# Altium PCB 逆变器直流升压.PcbDoc
Units mm, origin at the board's own origin, x right, y up, seen from the top; angles counter-clockwise.
Board outline 135.25 x 81.15 mm, 2 copper layers (Top Layer, Bottom Layer); 62 components, 41 nets, 187 pads, 0 vias.
Unrouted connection lines stored in the file: 4.
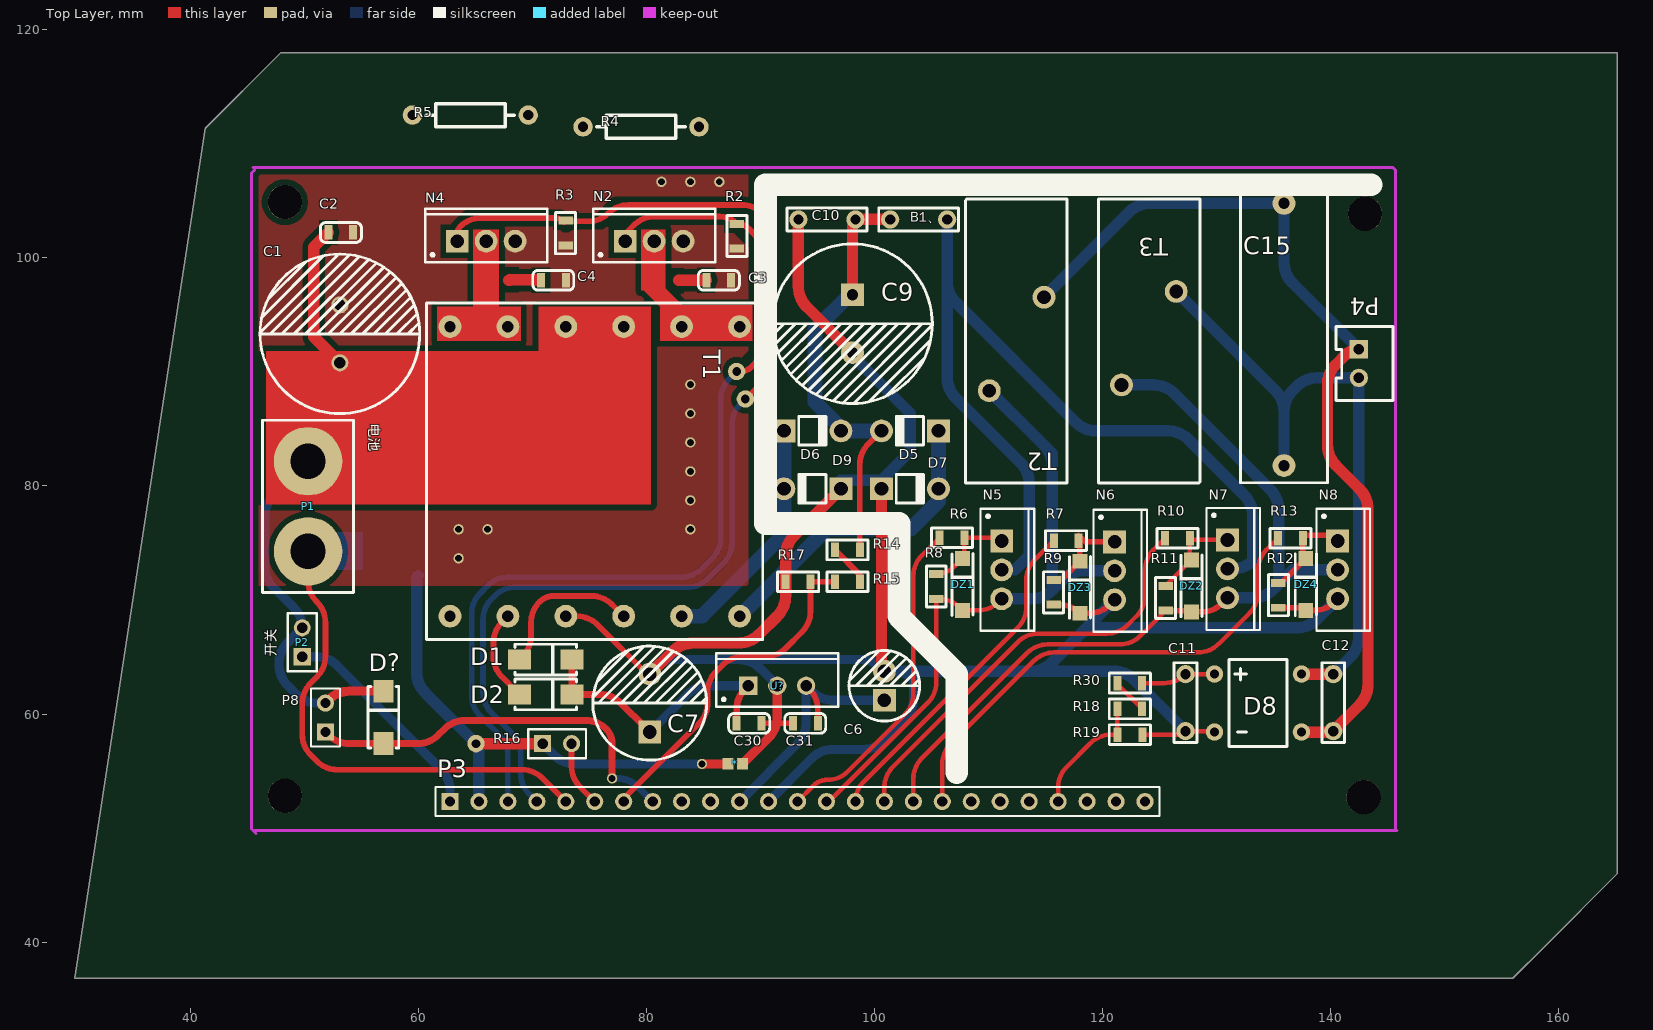
[diagram p0: Top Layer view]
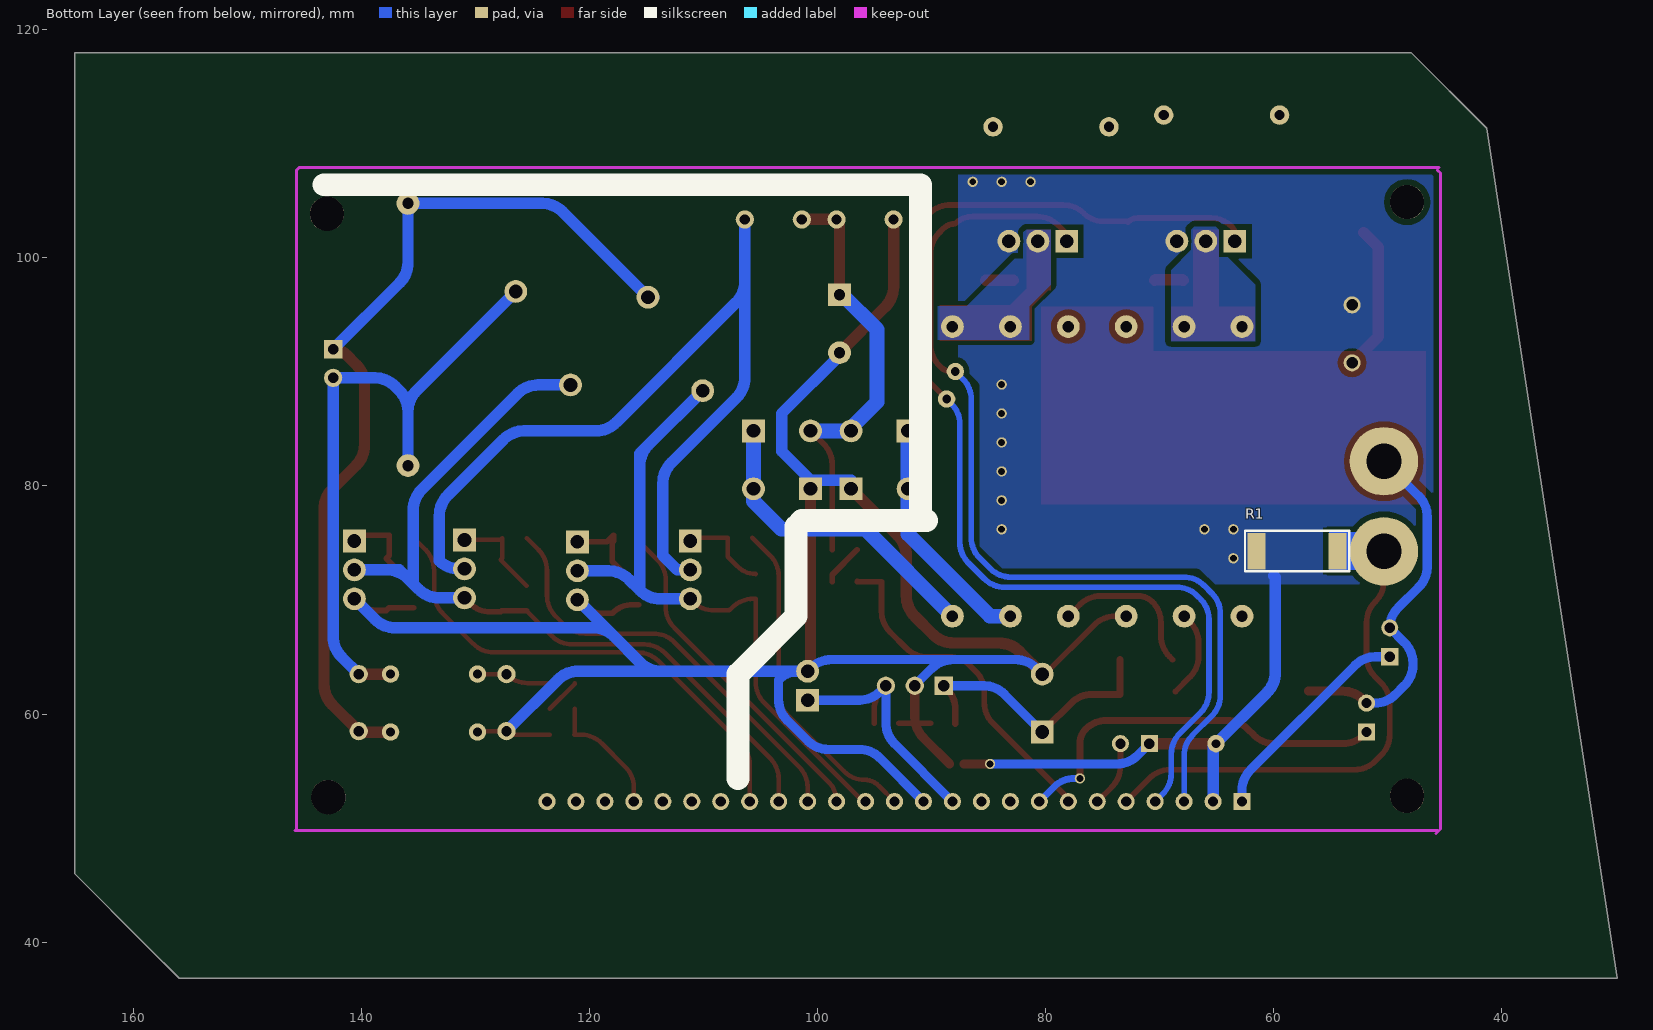
[diagram p1: Bottom Layer view, seen from below]

## Layer stack, top to bottom
Top Layer: signal copper 0.0356
Dielectric: dielectric 0.32, FR-4, Dk 4.8
Bottom Layer: signal copper 0.0356

## Board outline
41.275,111.379 47.879,117.983 165.1,117.983 165.1,45.974 158.75,39.624 155.956,36.83 29.845,36.83

## Design rules (kind name [scope] priority, off if disabled: settings)
Clearance [All] p1: gap=0.3
PolygonConnect [All] p1: connectstyle=Direct reliefconductorwidth=0.254 reliefentries=4 polygonreliefangle="90 Angle"
RoutingVias [All] p1: holewidth=0.711 width=1.27 viastyle="Through Hole" minholewidth=0.711 minwidth=1.27 maxholewidth=0.711 maxwidth=1.27
SilkscreenOverComponentPads SilkToSolderMaskClearance [IsPad] p1: minsilkscreentomaskgap=0.254
SolderMaskExpansion [All] p1: expansion=0.102
Width [All] p1: maxlimit=9 minlimit=0.254 preferedwidth=0.254 minimp=50.000000 maximp=50.000000 favimp=50.000000
27 further rules are at their usual default settings.

## Components (designator, comment, footprint, x,y, rotation, side; value= is the part's Value field where it differs from the comment)
* "TIAO" ta 88.392,55.626 r180 top
B1、 "保险" CAP3 101.346,103.378 r0 top
C1 "2200uf" 2200uf#1 53.086,93.345 r180 top
C2 "105" 0805C 52.07,102.235 r0 top
C3 "103" 0805C 85.217,98.046 r0 top
C4 "103" 0805C 72.898,98.044 r180 top
C6 "470uf" 220uf-16v 100.838,62.484 r180 top
C7 "470uf" 470uf-25v 80.264,60.96 r180 top
C9 "150uf" 2200uf#2 98.044,94.234 r0 top
C10 "1KV/103" CAP3 98.298,103.378 r180 top
C11 "1KV/103" CAP3 127.254,63.5 r270 top
C12 "1KV/103" CAP3 140.208,63.5 r270 top
C15 "600V/4.7uf" c-23mm 135.89,81.788 r90 top
C30 "105" 0805C 87.884,59.182 r0 top
C31 "105" 0805C 94.996,59.182 r180 top
D1 "107" DO-214 68.834,64.77 r0 top
D2 "107" DO-214 68.834,61.722 r0 top
D5 "1N4007" "1N4007 - duplicate" 105.584,84.836 r180 top
D6 "1N4007" "1N4007 - duplicate" 92.028,84.836 r0 top
D7 "1N4007" "1N4007 - duplicate" 100.584,79.756 r0 top
D8 "DB107" DB107 137.414,58.42 r180 top
D9 "1N4007" "1N4007 - duplicate" 97.028,79.756 r180 top
D? "1N4007" DO-214 56.896,57.404 r90 top
DZ1 "15v" "DO-214 -2" 107.696,69.088 r90 top
DZ2 "15v" "DO-214 -2" 127.762,68.961 r90 top
DZ3 "15v" "DO-214 -2" 117.983,68.834 r90 top
DZ4 "15v" "DO-214 -2" 137.795,69.088 r90 top
N2 "3025" TO-220AB-2 80.645,101.473 r0 top
N4 "3025" TO-220AB-2 65.913,101.473 r0 top
N5 "3025" TO-220AB-2 111.125,72.644 r270 top
N6 "3025" TO-220AB-2 121.031,72.559 r270 top
N7 "3025" TO-220AB-2 130.937,72.729 r270 top
N8 "3025" TO-220AB-2 140.589,72.644 r270 top
P1 "电池" M3 50.292,82.169 r0 top
P2 "开关" HDR1X2 49.784,65.024 r90 top
P3 "Header 25" HDR1X25 62.738,52.324 r0 top
P4 "CON2" CON2 139.954,94.488 r270 top
P8 "开关" HDR1X2 51.816,58.42 r90 top
R1 "0.005" 2512R 57.912,74.295 r0 bottom
R2 "10k" 0805R 87.884,100.838 r90 top
R3 "10k" 0805R 72.898,103.251 r270 top
R4 "10" AXIAL0.4 79.502,111.506 r0 top
R5 "10" AXIAL0.4 64.516,112.522 r180 top
R6 "22" 0805R 107.843,75.438 r180 top
R7 "22" 0805R 117.856,75.184 r180 top
R8 "10K" 0805R 105.41,72.263 r270 top
R9 "10K" 0805R 115.697,71.755 r270 top
R10 "22" 0805R 125.476,75.438 r0 top
R11 "10K" 0805R 125.476,69.088 r90 top
R12 "10K" 0805R 135.382,69.342 r90 top
R13 "22" 0805R 135.382,75.438 r0 top
R14 "50k" 0805R 96.52,74.422 r0 top
R15 "50k" 0805R 96.52,71.628 r0 top
R16 "ntc" HDR1X2 70.866,57.404 r0 top
R17 "ntc" 0805R 92.202,71.628 r0 top
R18 "50k" 0805R 121.284,60.474 r0 top
R19 "50k" 0805R 123.444,58.166 r180 top
R30 "50k" 0805R 121.284,62.738 r0 top
T1 "变压器EE28" EE28 88.138,93.98 r270 top
T2 "磁环电感" L-25MM 116.84,105.156 r270 top
T3 "磁环电感" L-25MM 119.634,80.264 r90 top
U? "LM7805" TO-220AB 91.44,62.484 r0 top

## Footprints (in the part's own frame and the unit in brackets; to place one, negate y for a bottom-side part, rotate by r counter-clockwise, add the part's x,y. Pads: shape width x height; smd on the part's side, far side on the other; paste and mask are expansions set on the pad)
"1N4007 - duplicate" [mm]
  rect 2x2 hole 1.2: A(0,0)
  round 2 hole 1.2: K(5,0)
  silkscreen extent 1.3,-1.3 3.75,1.25
220uf-16v [mm]
  rect 2x2 hole 1.2: 1(0,1.27)
  round 2 hole 1.2 paste+0: 2(0,-1.27)
  silkscreen extent -3.1,-3.1 3.1,3.1
470uf-25v [mm]
  rect 2x2 hole 1.2: 1(0,2.54)
  round 2 hole 1.2: 2(0,-2.54)
  silkscreen extent -5,-5 5,5
0805C [mm]
  rect 0.7x1.27 smd: 1(0,0) 2(2.18,0)
  silkscreen extent -0.7,-0.87 2.9,0.87, body extent 0.12,-0.63 2.12,0.63, height 0.77
0805R [mm]
  rect 0.7x1.27 smd: 1(-0.02,-0.02) 2(2.16,-0.02)
  silkscreen extent -0.72,-0.89 2.88,0.85, body extent 0.1,-0.64 2.1,0.61, height 0.77
2200uf#1 [mm]
  round 1.5 hole 1: 1(0,2.54) 2(0,-2.54)
  silkscreen extent -7,-7 7,7
2200uf#2 [mm]
  rect 2x2 hole 1: 1(0,2.54)
  round 2 hole 1: 2(0,-2.54)
  silkscreen extent -7,-7 7,7
2512R [mm]
  rect 1.6x3.2 smd: 1(-3.556,0) 2(3.556,0)
  silkscreen extent -4.57,-1.78 4.57,1.78
AXIAL0.4 [mm]
  round 1.7 hole 0.9: 1(-5.088,-0.006) 2(5.072,-0.006)
  silkscreen extent -3.87,-1.02 3.85,1.01, body extent -5.41,-1.21 5.39,1.19, height 4.1
c-23mm [mm]
  round 2 hole 1: 1(0,0) 2(23,0)
  silkscreen extent -1.5,-3.81 24.5,3.81
CAP3 [mm]
  round 1.6 hole 0.9: 1(0,0) 2(5,0)
  silkscreen extent -1,-1 6,1
CON2 [mm]
  rect 1.6x1.6 hole 0.9: 1(2.5,2.5)
  round 1.6 hole 0.9: 2(5,2.5)
  silkscreen extent 0.5,0.5 7,5.5, body extent 0.45,0.42 7.05,5.5, height 10
DB107 [mil]
  round 60 hole 31.5: 1(0,0) 2(0,-200) 3(300,-200) 4(300,0)
  silkscreen extent 50,-250 250,50
DO-214 [mm]
  rect 2x1.75 smd: A(0,0) K(4.6,0)
  silkscreen extent -0.4,-1.35 5,1.35, body extent -0.2,-1.34 4.91,1.33, height 2.12
"DO-214 -2" [mm]
  rect 1.3x1.3 smd: A(0,0) K(4.56,0)
  silkscreen extent -0.43,-0.93 4.99,0.92, body extent -0.2,-1.34 4.91,1.33, height 2.12
EE28 [mm]
  round 2 hole 1: 1(0,0) 2(0,-5.08) 3(0,-10.16) 4(0,-15.24) 5(0,-20.32) 6(0,-25.4) 7(25.4,-25.4) 8(25.4,-20.32) 9(25.4,-15.24) 10(25.4,-10.16) 11(25.4,-5.08) 12(25.4,0)
  silkscreen extent -2.07,-27.47 27.43,2.03
HDR1X2 [mm] "Connector;"
  rect 1.5x1.5 hole 0.9: 1(0,0)
  round 1.5 hole 0.9: 2(2.54,0)
  silkscreen extent -1.27,-1.27 3.81,1.27
HDR1X25 [mm] "Connector; H"
  rect 1.5x1.5 hole 0.9: 1(0,0)
  round 1.5 hole 0.9: 2(2.54,0) 3(5.08,0) 4(7.62,0) 5(10.16,0) 6(12.7,0) 7(15.24,0) 8(17.78,0) 9(20.32,0) 10(22.86,0) 11(25.4,0) 12(27.94,0) 13(30.48,0) 14(33.02,0) 15(35.56,0) 16(38.1,0) 17(40.64,0) 18(43.18,0) 19(45.72,0) 20(48.26,0) 21(50.8,0) 22(53.34,0) 23(55.88,0) 24(58.42,0) 25(60.96,0)
  silkscreen extent -1.27,-1.27 62.23,1.27
L-25MM [mm]
  round 2 hole 1.2: 1(8.6,-2) 2(16.8,-6.8)
  silkscreen extent 0,-8.89 24.89,0
M3 [mm]
  round 6 hole 3.1: 1(0,0) 2(0,-7.9)
  silkscreen extent -4,-11.5 4,3.6
ta [mm]
  rect 1x1 smd: 1(0,0) 2(1.27,0)
TO-220AB [mm] "TO, Thru-Hole, Vertical, Heatsink Mounted; 3 In-Lin"
  rect 1.6x1.6 hole 1: 1(-2.54,0)
  round 1.6 hole 1: 2(0,0) 3(2.54,0)
  silkscreen extent -5.35,-1.85 5.35,2.85, body extent -5.4,-1.9 5.4,2.9, height 19.3
TO-220AB-2 [mm]
  round 2 hole 1.2: D(0,0) S(2.54,0)
  rect 2x2 hole 1.2: G(-2.54,0)
  silkscreen extent -5.35,-1.85 5.35,2.85, body extent -5.4,-1.9 5.4,2.9, height 19.3

## Part data
P1: library part CON2
P2 P8: library part "Header 2", "Header, 2-Pin"
P3: "Header, 25-Pin"
R1 R2 R3 R4 R5 R6 R7 R8 R9 R10 R11 R12 R13 R14 R15 R17 R18 R19 R30: library part R
R16: library part R, "电阻"

## Free pads (board coordinates)
  round 1.524 hole 0.762: 0(87.884,90.043) 1(88.646,87.63) 25(65.024,57.404)
  round 3 hole 3: 1(48.26,104.902) 2(48.26,52.832) 3(142.875,52.705) 4(143.002,103.886)
  round 0.9 hole 0.6: 26(84.836,55.626) 29(83.82,88.9) 30(83.82,86.36) 31(83.82,83.82) 32(83.82,81.28) 33(83.82,78.74) 34(83.82,76.2) 35(63.5,73.66) 36(63.5,76.2) 37(66.04,76.2) 38(86.36,106.68) 39(83.82,106.68) 40(81.28,106.68) 41(76.962,54.356)

## Nets (pads, with @x,y where several pads share a name; then routed paths per layer and width w, separated by ;. In a path a pad name is that pad's centre, name@x,y a point inside that pad or via, vN(x,y) a via of type N, cw(c..) or ccw(c..) an arc to the next point about the centre after c; other vN are vias at no path point)
12V: C6.1 C31.1 P3.11 U?.3 | length 23
  Top Layer w0.5: U?.3@94.234,62.23 94.252,62.212 cw(c92.456,60.416) 94.996,60.416 C31.1
  Bottom Layer w0.8: P3.11 93.236,57.422 ccw(c91.44,59.218) 93.98,59.218 U?.3 94.506,61.958 ccw(c96.302,63.754) 96.302,61.214 C6.1
310V: B1、.1 C9.1 C10.1 D5.K D6.K R14.2 | length 38.2
  Top Layer w0.5: R14.2 98.68,81.88 cw(c101.22,81.88) 99.424,83.676 D5.K@100.076,84.328
  Top Layer w1: C9.1 98.044,103.124 C10.1 B1、.1
  Bottom Layer w1.3: D6.K D6.K@97.282,84.836 ; C9.1@97.79,96.774 94.742,93.726 94.742,87.376 D6.K@97.282,84.836 ; D5.K@100.838,84.836 D5.K D6.K@97.282,84.836
AC1: C12.1 C15.1 D8.2 P4.2 T3.2 | length 56.9
  Top Layer w1: D8.2 C12.1
  Bottom Layer w1: T3.2 135.146,88.352 cw(c133.35,86.556) 135.89,86.556 ; C15.1 135.89,86.556 ; C12.1 141.71,65.002 ccw(c139.914,66.798) 142.454,66.798 P4.2 138.816,89.488 ccw(c138.816,86.948) 137.02,88.744 136.634,88.358 ccw(c138.43,86.562) 136.115,87.608 ccw(c138.43,86.562) 135.89,86.562 135.89,86.556
AC2: C12.2 C15.2 D8.1 P4.1 T2.1 | length 80.2
  Top Layer w1: D8.1 140.128,58.42 C12.2 142.512,60.804 ccw(c140.716,62.6) 143.256,62.6 143.256,77.942 ccw(c140.716,77.942) 142.512,79.738 140.444,81.806 cw(c142.24,83.602) 139.7,83.602 139.7,88.864 cw(c142.24,88.864) 139.954,89.971 cw(c142.24,88.864) 140.444,90.66 141.29,91.506 cw(c142.454,90.342) P4.1
  Bottom Layer w1: T2.1@114.332,96.556 T2.1@114.586,96.81 ; T2.1 122.328,104.044 cw(c124.124,102.248) 124.124,104.788 C15.2 135.89,99.604 ccw(c138.43,99.604) 136.634,97.808 P4.1
ADC4: P3.7 R15.1 R17.2 | length 30
  Top Layer w0.5: P3.7 77.978,52.578 84.6,59.2 ccw(c82.804,60.996) 85.344,60.996 85.344,61.94 cw(c87.884,61.94) 86.088,63.736 86.632,64.28 cw(c88.428,62.484) 88.428,65.024 90.388,65.024 ccw(c90.388,67.564) 91.495,65.278 ccw(c90.388,67.564) 92.184,65.768 93.618,67.202 ccw(c91.822,68.998) 94.362,68.998 R17.2 96.46,71.608 R15.1@96.48,71.628
CAI-V: P3.22 R18.1 R19.2 | length 11
  Top Layer w0.4: P3.22 116.078,53.558 cw(c118.618,53.558) 116.097,53.867 cw(c118.618,53.558) 116.822,55.354 118.91,57.442 cw(c120.706,55.646) 120.397,58.167 cw(c120.706,55.646) 120.706,58.186 R19.2 121.264,58.206 R18.1
G: *.1 C6.2 C7.2 C9.2 C10.2 C11.2 C30.2 C31.2 D7.A D8.4 D9.A DZ3.A DZ4.A N6.S N8.S P3.12 R9.2 R12.1 R17.1 R19.1 T1.9 U?.2 | length 221.7
  Top Layer w0.4: R19.1 C11.2@126.94,58.186 ; C11.2 129.714,58.5 D8.4
  Top Layer w0.5: T1.9 73.878,68.58 cw(c73.878,66.04) 75.674,67.836 80.01,63.5 C7.2 ; C30.2 91.381,59.182 ; 91.44,59.726 91.44,59.182 C31.2 ; R9.2 116.17,69.595 cw(c116.17,67.055) 117.966,68.851 DZ3.A 118.794,68.834 ccw(c118.794,71.374) 120.59,69.578 N6.S ; R12.1 137.561,69.322 DZ4.A 138.521,69.088 ccw(c138.521,71.628) 140.317,69.832 N8.S
  Top Layer w0.6: C11.2@126.94,58.186 C11.2@127.254,58.186
  Top Layer w0.8: *.1 90.696,57.93 ccw(c88.9,59.726) 91.363,59.105 ccw(c88.9,59.726) 91.381,59.182 ccw(c88.9,59.726) 91.44,59.726 U?.2
  Top Layer w1: C7.2 82.248,65.484 cw(c84.044,63.688) 84.044,66.228 88.036,66.228 ccw(c88.036,68.768) 89.832,66.972 91.438,68.578 ccw(c89.642,70.374) 92.182,70.374 R17.1 92.182,73.858 cw(c94.722,73.858) 92.926,75.654 D9.A ; C10.2 93.298,97.492 ccw(c95.838,97.492) 94.042,95.696 C9.2 ; D7.A 100.584,64.008 C6.2
  Bottom Layer w0.8: C7.2 80.79,64.026 cw(c82.586,62.23) 82.586,64.77 88.102,64.77 ; 89.94,63.984 89.898,64.026 ccw(c88.102,62.23) 88.102,64.77 ; P3.12 94.506,56.152 cw(c96.302,54.356) 96.302,56.896 99.024,56.896 ccw(c99.024,59.436) 100.82,57.64 102.634,59.454 ccw(c100.838,61.25) 103.378,61.25 103.378,62.992 103.36,63.01 ccw(c101.564,61.214) C6.2@101.564,63.754 ; U?.2 91.44,62.534 89.204,64.77 ; C6.2 100.566,64.026 ccw(c98.77,62.23) 98.77,64.77 89.204,64.77 ; 88.102,64.77 89.204,64.77
  Bottom Layer w1: D9.A@97.028,80.518 100.584,80.518 103.124,83.058 103.124,86.36 C9.2@97.79,91.694 ; C6.2 101.564,63.754 113.714,63.754 ; N6.S 117.832,66.82 ; C11.2 122.744,63.01 ccw(c120.948,61.214) 120.948,63.754 113.714,63.754 ; N8.S 138.793,68.308 cw(c136.997,70.104) 136.997,67.564 119.628,67.564 ccw(c119.628,65.024) 117.832,66.82 ; 113.714,63.754 ccw(c113.714,66.294) 115.51,64.498 117.832,66.82
GND: *.2 C1.2 C2.2 C3.2 C4.1 N2.S N4.S P3.2 pad.25 pad.26 pad.29 pad.30 pad.31 pad.32 pad.33 pad.34 pad.35 pad.36 pad.37 pad.38 pad.39 pad.40 R1.2 R2.1 R3.2 R16.1 | length 44.7
  Top Layer w0.8: pad.26 *.2
  Top Layer w1: pad.25 R16.1
  Bottom Layer w0.8: R16.1 71.9,56.37 ccw(c73.696,58.166) 72.448,55.954 ccw(c73.696,58.166) 73.696,55.626 pad.26
  Bottom Layer w1: 59.944,72.136 59.817,72.009 59.817,63.663 ccw(c62.357,63.663) 60.561,61.867 pad.25 65.278,57.15 P3.2
HS1: DZ1.A N5.S N6.D P3.14 R8.2 T2.2 | length 71.5
  Top Layer w0.4: P3.14 ccw(c95.758,52.874) 96.147,52.485 104.646,60.984 ccw(c102.85,62.78) 105.39,62.78 R8.2 105.629,70.103 cw(c105.629,67.563) 107.425,69.359 DZ1.A 109.057,69.088 ccw(c109.057,71.628) 110.853,69.832 N5.S
  Bottom Layer w1: T2.2 114.808,83.588 ; N5.S 113.756,70.104 ccw(c113.756,72.644) 115.552,70.848 115.552,81.792 ccw(c113.012,81.792) 114.808,83.588 ; N6.D 118.315,72.559 ccw(c118.315,70.019) 116.519,71.815 115.57,70.866 115.57,82.826 114.808,83.588
HS2: DZ2.A N7.S N8.D P3.17 R11.1 T3.1 | length 74.2
  Top Layer w0.4: P3.17 103.378,54.32 cw(c105.918,54.32) 104.122,56.116 113.377,65.371 cw(c115.142,63.606) 115.142,66.102 121.478,66.102 ccw(c121.478,68.642) 123.274,66.846 R11.1
  Top Layer w0.5: R11.1 127.655,69.068 DZ2.A 128.657,68.961 ccw(c128.657,71.501) 130.453,69.705 N7.S
  Bottom Layer w1: T3.1 124.46,88.864 cw(c124.46,86.324) 126.256,88.12 134.68,79.696 cw(c132.884,77.9) 135.424,77.9 135.424,71.416 ; N7.S 133.145,70.189 ccw(c133.145,72.729) 134.941,70.933 135.424,71.416 ; N8.D 137.704,72.644 ; 135.424,71.416 135.908,71.9 ; 135.908,71.9 cw(c137.704,70.104) 137.704,72.644 ; 135.908,71.9 136.652,72.644 137.704,72.644
HS3: P3.20
MA: P1.2 P3.5 R1.1 | length 42.9
  Top Layer w0.5: P1.2 50.292,71.664 ccw(c52.832,71.664) 51.036,69.868 51.072,69.832 cw(c49.276,68.036) 51.816,68.036 51.816,65.06 cw(c49.276,65.06) 51.072,63.264 50.528,62.72 ccw(c52.324,60.924) 49.784,60.924 49.784,58.202 ccw(c52.324,58.202) 50.528,56.406 51.072,55.862 ccw(c52.868,57.658) 52.868,55.118 69.052,55.118 cw(c69.052,52.578) 70.576,54.61 cw(c69.052,52.578) 70.848,54.374 P3.5
NetB1、_2: B1、.2 N5.D N7.D | length 77.6
  Bottom Layer w1: B1、.2 106.346,97.906 ; N5.D 112.268,72.644 113.538,73.914 113.538,80.228 ccw(c110.998,80.228) 112.794,82.024 107.09,87.728 cw(c108.886,89.524) 106.346,89.524 106.346,97.906 ; N7.D 131.401,72.729 ccw(c131.401,75.186) 133.137,73.447 ; 106.346,97.906 ccw(c108.886,97.906) 107.09,96.11 117.62,85.58 ccw(c119.416,87.376) 119.416,84.836 125.694,84.836 cw(c125.694,82.296) 127.49,84.092 132.394,79.188 cw(c130.598,77.392) 133.138,77.392 133.138,73.448 ; 133.137,73.447 ccw(c131.401,75.186) 133.138,73.448
NetC3_1: C3.1 R4.2 | length 2.4
  Top Layer w1: 82.804,98.046 C3.1
NetC4_2: C4.2 R5.1 | length 2.5
  Top Layer w1: 67.905,98.046 67.965,98.046 ; 67.965,98.096 70.346,98.096 C4.2@70.396,98.046
NetC7_1: C7.1 C30.1 D1.K D2.K U?.1 | length 24.4
  Top Layer w0.6: D1.K D2.K 75.91,61.722 cw(c75.91,59.182) 77.706,60.978 C7.1@79.883,58.801 ; C30.1 87.884,60.416 cw(c90.424,60.416) 88.628,62.212 U?.1
  Bottom Layer w0.8: C7.1 83.584,61.74 cw(c85.38,59.944) 85.38,62.484 U?.1
NetC11_1: C11.1 D8.3 R30.2 | length 6.6
  Top Layer w0.4: R30.2 125.42,62.718 ccw(c125.42,65.258) 127.216,63.462 C11.1 D8.3
NetD1_A: D1.A T1.10 | length 13.7
  Top Layer w0.5: D1.A 69.106,65.042 ccw(c67.31,66.838) 69.85,66.838 69.85,68.036 cw(c72.39,68.036) 70.104,69.143 cw(c72.39,68.036) 70.594,69.832 cw(c71.864,68.562) 71.864,70.358 75.148,70.358 cw(c75.148,67.818) 76.944,69.614 T1.10
NetD2_A: D2.A T1.8 | length 7.8
  Top Layer w0.5: T1.8 67.292,68.054 ccw(c69.088,66.258) 66.548,66.258 66.548,65.06 ccw(c69.088,65.06) 67.292,63.264 D2.A@68.58,61.976
NetD5_A: D5.A D7.K T1.12 | length 27.8
  Bottom Layer w1.3: T1.12 95.758,76.2 103.124,76.2 105.584,78.66 105.584,80.518 D5.A
NetD6_A: D6.A D9.K T1.11 | length 21
  Bottom Layer w1.3: T1.11 84.836,68.58 92.028,75.772 92.028,80.518 D6.A
NetDZ1_K: DZ1.K N5.G R6.1 R8.1 | length 8
  Top Layer w0.4: R8.1 ccw(c105.39,74.555) 106.995,72.947 ; 106.996,72.948 107.843,73.795 R6.1@107.843,75.458 ; R6.1 110.464,75.458 cw(c110.464,74.523) N5.G
NetDZ2_K: DZ2.K N7.G R10.2 R11.2 | length 8.5
  Top Layer w0.4: R11.2 DZ2.K@127.762,73.514 ; DZ2.K 127.636,73.647 R10.2 127.785,75.269 N7.G
NetDZ3_K: DZ3.K N6.G R7.1 R9.1 | length 8.7
  Top Layer w0.5: R9.1 116.364,71.775 DZ3.K 117.983,75.057 117.856,75.184 117.856,75.692 118.449,75.099 N6.G
NetDZ4_K: DZ4.K N8.G R12.2 R13.2 | length 8.7
  Top Layer w0.5: R12.2 135.649,71.502 DZ4.K 137.542,73.901 137.542,75.672 140.101,75.672 N8.G
NetN2_D: N2.D R4.1 T1.1 T1.2 | length 7.5
  Top Layer w1: 80.304,98.046 80.645,98.387 N2.D
  Top Layer w1.5: 80.304,98.046 80.304,97.623 82.804,95.123
NetN4_D: N4.D R5.2 T1.5 T1.6 | length 3.6
  Top Layer w1: 65.405,98.046 65.913,98.554 N4.D
NetP2_1: P2.1 P3.1 | length 19.2
  Bottom Layer w0.8: P2.1 51.018,65.024 cw(c51.018,62.484) 52.814,64.28 61.994,55.1 cw(c60.198,53.304) 62.738,53.304 P3.1
NetR14_1: R14.1 R15.2 | length 3.7
  Top Layer w0.5: R14.1 98.68,72.222 R15.2
NetR18_2: R18.2 R30.1 | length 3.2
  Top Layer w0.4: R30.1 121.264,62.634 R18.2
NTC1: P3.6 R16.2 | length 5.8
  Top Layer w0.5: R16.2 73.406,55.408 ccw(c75.946,55.408) 74.15,53.612 P3.6
PWM1: N2.G P3.3 pad.0 R2.2 | length 83.8
  Top Layer w0.5: N2.G@78.105,102.108 78.885,102.888 cw(c80.681,101.092) 80.681,103.632 86.373,103.632 cw(c86.373,101.467) 87.6,103.251 cw(c86.373,101.467) R2.2 cw(c87.904,101.516) 88.952,102.564 89.299,102.217 cw(c87.503,100.421) 90.008,100.843 cw(c87.503,100.421) 90.043,100.421 90.043,92.365 cw(c87.503,92.365) 90.001,91.906 cw(c87.503,92.365) 89.299,90.569 89.154,90.424 cw(c88.234,91.344) 88.234,90.043 pad.0
  Bottom Layer w0.5: P3.3 67.818,56.352 ccw(c65.278,56.352) 67.074,58.148 65.387,59.835 cw(c67.183,61.631) 64.643,61.631 64.643,68.798 cw(c67.183,68.798) 65.387,70.594 66.058,71.265 cw(c67.854,69.469) 67.854,72.009 83.022,72.009 ccw(c83.022,74.549) 84.818,72.753 85.743,73.678 ccw(c83.947,75.474) 86.487,75.474 86.487,87.594 cw(c89.027,87.594) 87.231,89.39 pad.0
PWM2: N4.G P3.4 pad.1@88.646,87.63 R3.1 | length 102
  Top Layer w0.5: N4.G 63.373,102.104 cw(c64.302,102.104) 63.645,102.761 cw(c65.441,100.965) 65.441,103.505 71.862,103.505 cw(c71.862,102.255) 72.746,103.139 cw(c72.92,102.965) 72.92,103.211 74.926,103.211 ccw(c74.926,105.577) 76.598,103.903 cw(c78.395,102.108) 78.395,104.648 88.356,104.648 cw(c88.356,102.108) 88.525,104.642 cw(c88.356,102.108) 90.152,103.904 cw(c88.484,102.236) 90.841,102.326 cw(c88.484,102.236) 90.843,102.236 90.843,90.879 cw(c88.303,90.879) 90.099,89.083 pad.1@88.646,87.63
  Bottom Layer w0.5: P3.4 69.689,52.993 cw(c71.485,54.789) 68.945,54.753 cw(c71.485,54.789) 68.945,54.789 68.945,56.495 ccw(c66.405,56.495) 68.201,58.291 66.387,60.105 cw(c68.183,61.901) 65.681,61.463 cw(c68.183,61.901) 65.643,61.901 65.643,68.343 cw(c68.055,68.343) 66.349,70.049 66.677,70.376 cw(c68.473,68.58) 67.135,70.739 cw(c68.473,68.58) 68.473,71.12 83.547,71.12 ccw(c83.547,73.66) 85.343,71.864 86.743,73.264 ccw(c84.947,75.06) 87.487,75.06 87.487,85.419 cw(c90.027,85.419) 88.231,87.215 pad.1@88.646,87.63
SPWM1: P3.13 R6.2 | length 28.9
  Top Layer w0.4: P3.13 94.61,53.716 cw(c95.849,52.477) 95.849,54.229 ccw(c95.849,56.769) 97.645,54.973 102.634,59.962 ccw(c100.838,61.758) 103.378,61.758 103.378,72.101 cw(c105.918,72.101) 104.122,73.897 R6.2
SPWM2: P3.15 R7.2 | length 29.8
  Top Layer w0.4: P3.15 cw(c100.751,52.324) 99.016,54.058 112.54,67.582 ccw(c110.744,69.378) 113.284,69.378 113.284,71.74 cw(c115.824,71.74) 114.028,73.536 R7.2
SPWM3: P3.16 R10.1 | length 37.3
  Top Layer w0.4: P3.16@100.838,52.578 100.838,53.558 cw(c103.378,53.558) 101.582,55.354 112.54,66.312 cw(c114.336,64.516) 113.229,66.802 cw(c114.336,64.516) 114.336,67.056 120.36,67.056 ccw(c120.36,69.596) 122.156,67.8 122.954,68.598 ccw(c121.158,70.394) 123.444,69.287 ccw(c121.158,70.394) 123.698,70.394 123.698,72.608 cw(c126.238,72.608) 124.442,74.404 R10.1
SPWM4: P3.18 R13.1 | length 43.4
  Top Layer w0.4: P3.18 105.918,55.59 cw(c108.458,55.59) 106.662,57.386 113.934,64.658 cw(c115.73,62.862) 115.73,65.402 128.358,65.402 ccw(c128.358,67.942) 130.154,66.146 132.86,68.852 ccw(c131.064,70.648) 133.35,69.541 ccw(c131.064,70.648) 133.604,70.648 133.604,72.608 cw(c136.144,72.608) 134.348,74.404 R13.1
SPWM5: P3.19
SPWM6: P3.21
VBAT: C1.1 C2.1 D?.K P1.1 P2.2 P8.2 T1.3 T1.4 | length 45.4
  Top Layer w0.8: P8.2 52.116,61.26 cw(c53.912,59.464) 53.912,62.004 D?.K
  Top Layer w1: C2.1 50.8,100.965 50.8,93.091 C1.1
  Bottom Layer w0.8: P1.1 47.236,79.113 ccw(c49.032,77.317) 46.492,77.317 46.492,72.924 ccw(c49.032,72.924) 46.503,72.684 ccw(c49.032,72.924) 47.236,71.128 49.066,69.298 cw(c47.331,67.564) P2.2 48.496,66.276 ccw(c50.292,64.48) 47.752,64.48 47.752,64.298 ccw(c50.292,64.298) 48.496,62.502 49.294,61.704 ccw(c51.09,63.5) 51.09,60.96 P8.2
WENKONG: D?.A P3.8 P8.1 pad.41 | length 34.5
  Top Layer w0.6: P8.1 52.088,58.148 ccw(c53.884,59.944) 53.884,57.404 D?.A 59.908,57.404 ccw(c59.908,59.944) 61.704,58.148 62.248,58.692 cw(c64.044,56.896) 64.044,59.436 74.64,59.436 cw(c74.64,56.896) 76.436,58.692 cw(c75.166,57.422) 76.962,57.422 pad.41
  Bottom Layer w0.6: pad.41 77.434,54.356 cw(c77.434,51.816) 79.23,53.612 P3.8
pads on no net: P3.9 P3.10 P3.23 P3.24 P3.25 T1.7

## Polygon pours and split planes (outlines as drawn)
NetN4_D on Bottom Layer "Bottom Layer-No Net" (solid, pour order 6): 61.595,92.71 68.961,92.71 68.961,96.774 68.961,98.933 67.183,100.711 67.183,101.981 67.183,102.489 66.929,102.743 65.786,102.743 65.024,102.743 64.77,102.489 64.77,100.076 64.008,100.076 61.595,97.663
NetN2_D on Bottom Layer "Bottom Layer-No Net" (solid, pour order 10): 89.408,92.837 81.407,92.837 81.407,95.758 79.629,97.536 79.502,97.663 79.502,102.489 81.661,102.489 81.915,102.235 81.915,99.949 82.677,99.949 86.868,95.758 88.773,95.758 89.408,95.758
GND on Bottom Layer "Bottom Layer-No Net" (solid, pour order 18): 45.339,71.247 45.466,71.374 87.63,71.374 87.63,107.95 45.466,107.95
GND on Top Layer "Bottom Layer-No Net" (solid, pour order 22): 45.339,71.247 88.773,71.247 88.9,71.374 88.9,104.267 88.9,107.95 45.466,107.95

## Keep-outs
Keep-Out Layer:
  lines w0.254: 45.593,49.784 145.669,49.784 145.669,107.696 145.415,107.95 45.466,107.95 123.571,107.95 ; 45.593,107.696 45.339,107.442 45.339,49.911 45.72,49.53 ; 45.72,49.784 145.796,49.784

## Other copper
Top Layer:
  rectangle net VBAT: 46.609,78.359 80.391,91.821
  rectangle net VBAT: 70.485,90.678 80.391,95.758
  rectangle net NetN4_D: 64.77,92.964 67.056,102.489
  rectangle net NetN4_D: 61.595,92.71 68.961,95.758
  rectangle net NetN2_D: 81.153,92.71 89.281,95.885
  rectangle net NetN2_D: 79.502,97.155 81.661,102.489
Bottom Layer:
  rectangle net MA: 50.038,72.644 55.118,75.946

## Silkscreen, mask and mechanical layers (free items; w line width, h text height)
Top Overlay:
  lines w2: 107.188,54.864 107.188,63.5 102.108,68.58 102.108,76.708 90.424,76.708 90.424,106.426 143.51,106.426
Bottom Overlay:
  lines w2: 106.934,54.356 106.934,63.5 101.854,68.58 101.854,76.454 101.346,76.962 90.424,76.962 90.932,77.47 90.932,106.426 143.256,106.426
Top Solder:
  lines w1: 80.645,101.473 80.645,97.409 83.058,94.996 83.058,93.98
  lines w2: 62.738,93.98 67.564,93.98 ; 65.913,94.107 65.913,101.473 ; 83.058,93.98 88.138,93.98
  lines w6: 50.292,82.169 75.311,82.169 75.184,82.296 ; 75.692,82.042 75.692,92.71
Bottom Solder:
  lines w2: 62.484,93.98 67.818,93.98 ; 65.913,94.107 65.913,101.473 ; 68.453,101.473 68.453,105.029 68.58,105.156 ; 80.772,101.346 80.772,99.822 83.312,97.282 83.312,93.98 88.392,93.98 ; 83.185,101.473 83.185,104.775
  lines w3: 53.086,95.885 53.086,100.076 58.42,105.41 82.55,105.41 83.185,104.775